# Allegro board ClassDAmp.brd
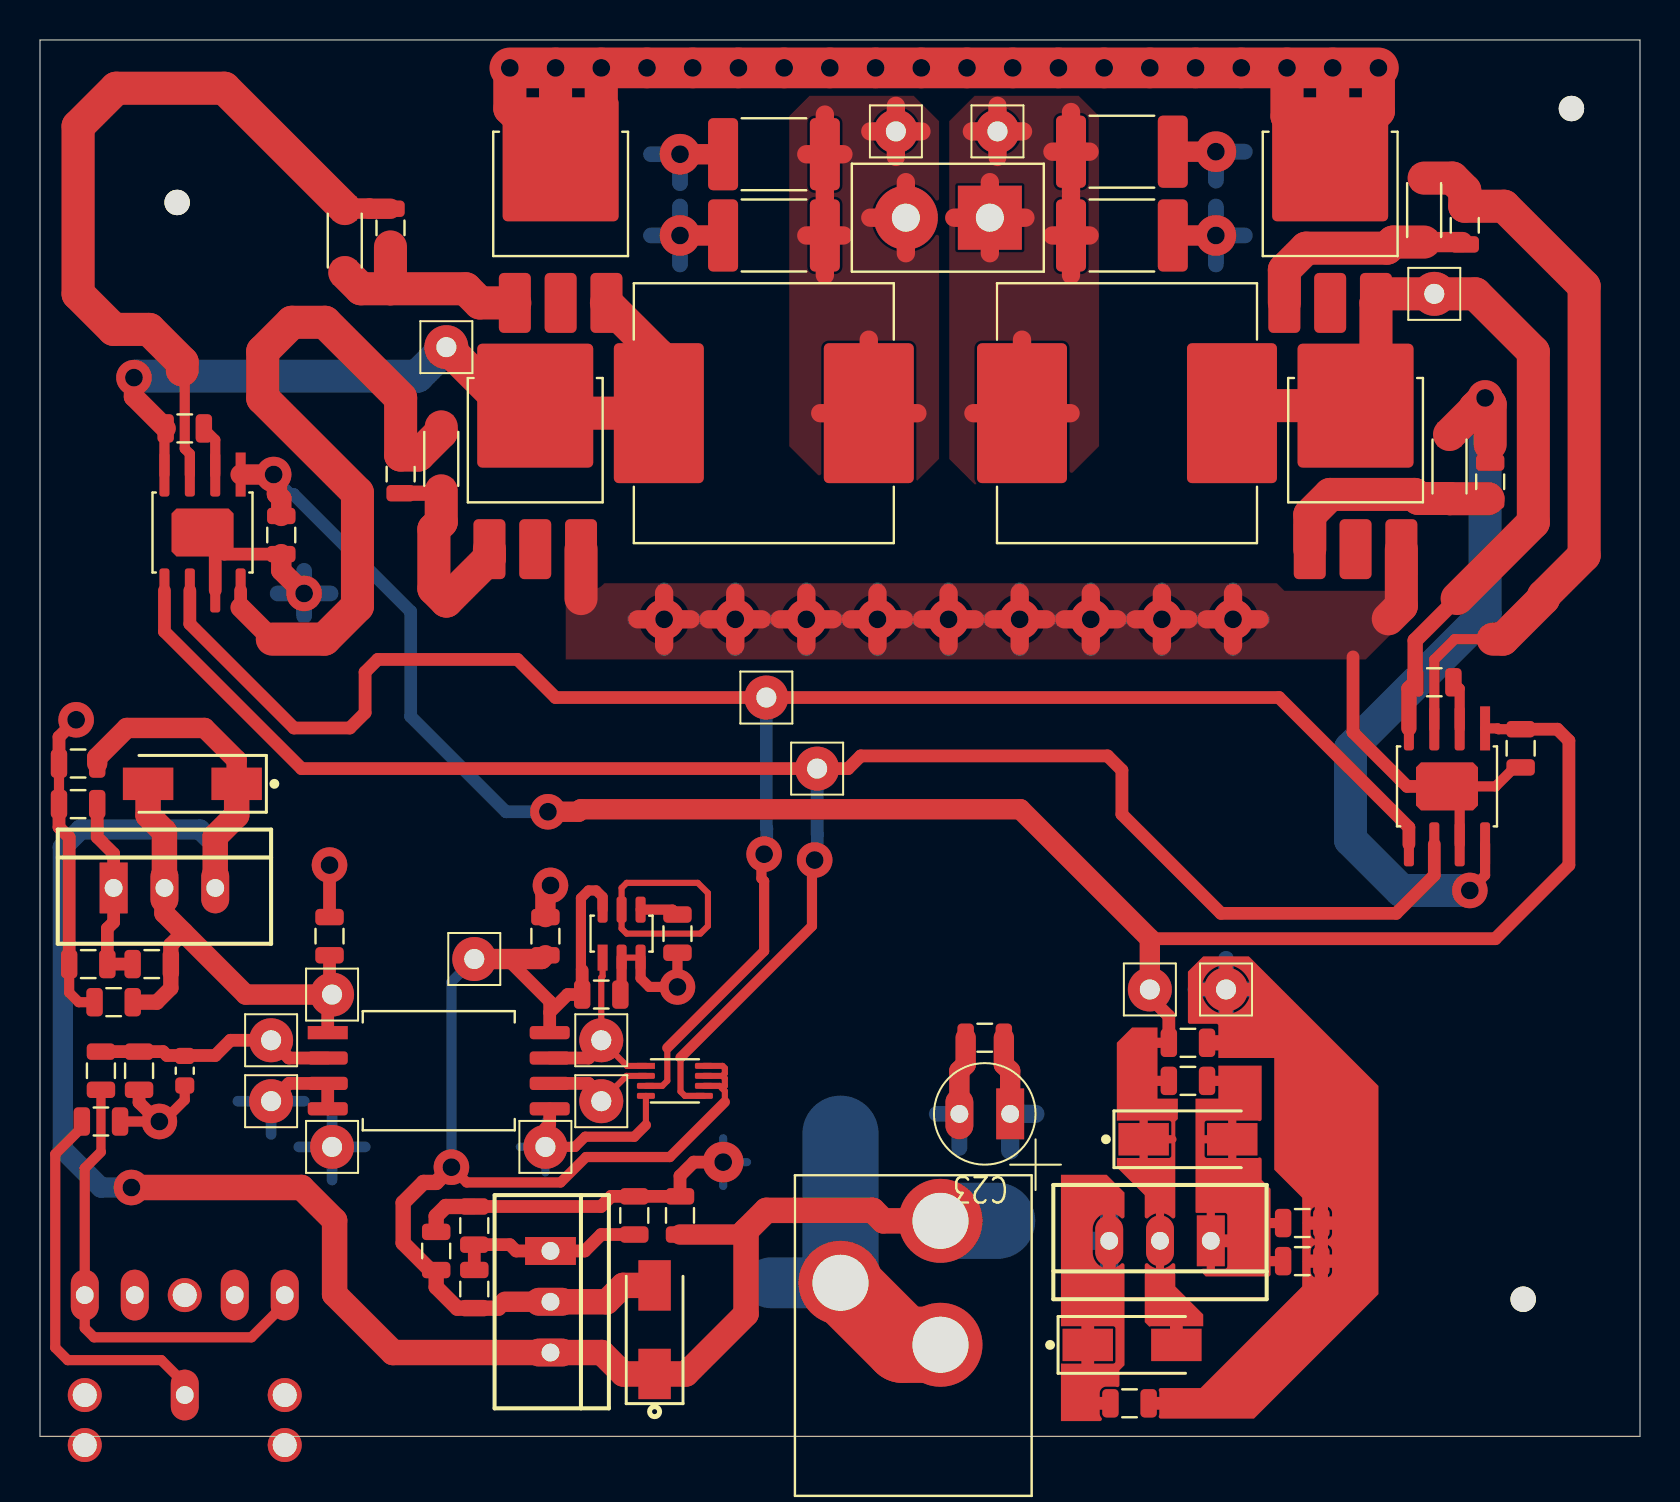
[diagram p0: board, top side]
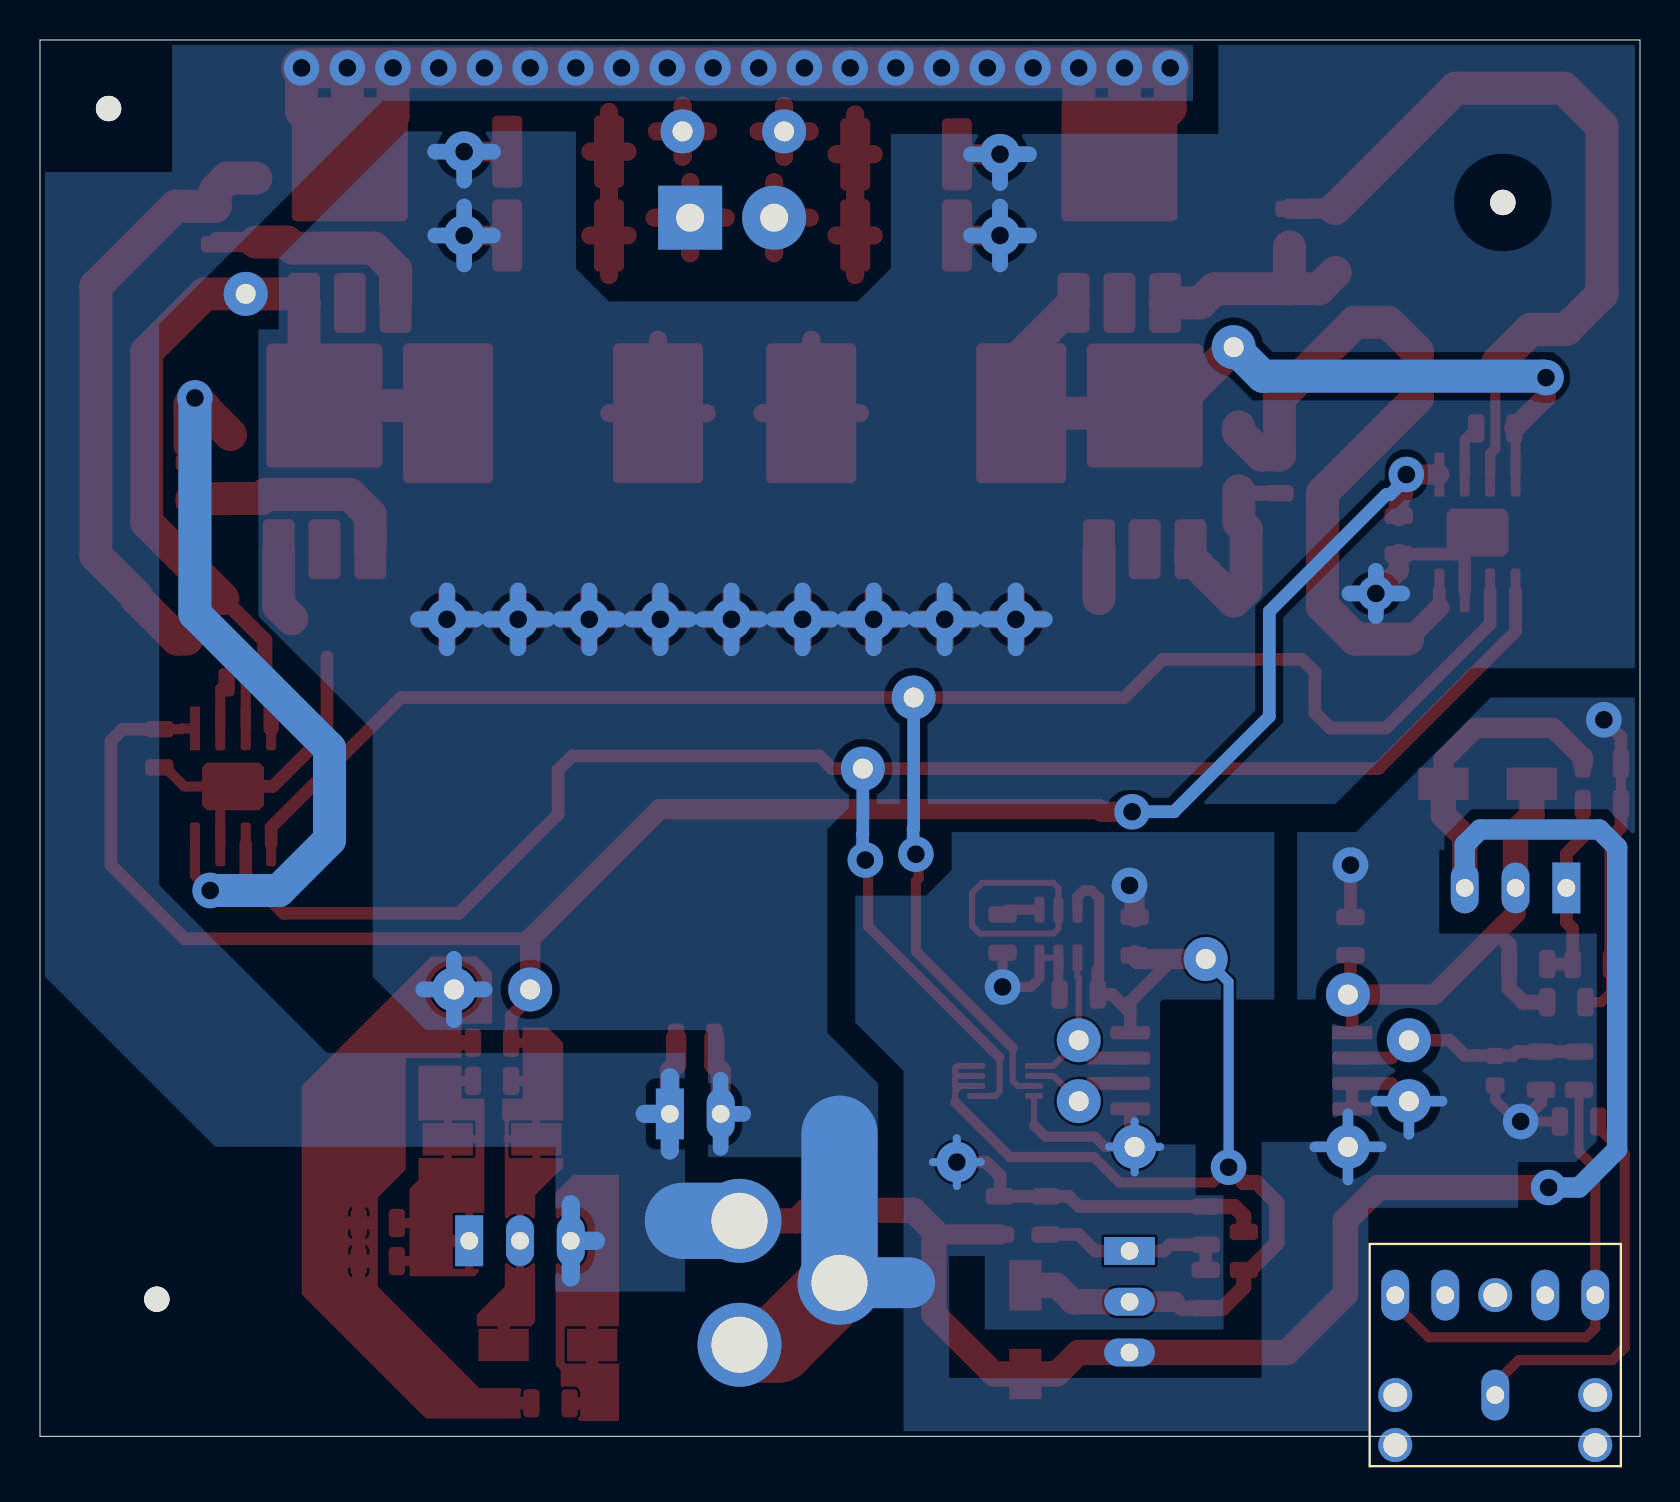
[diagram p1: board, bottom side, seen from below]

Outline 80.01 x 69.85 mm; copper layers: TOP, LAYER2, LAYER3, BOTTOM. Coordinates in mm from the lower left corner of the outline.
Outline path: 0,69.85 0,0 80.01,0 80.01,69.85 0,69.85

## Design rules (mm)
constraint set DEFAULT: min track width 0.152

## Placement (name value [footprint] x y rotation side)
C1  1n  [R0603RESC157X85X50L30N]  7.24 18.29 90 top
C2  100n  [R0805RESC200X125X50L30N]  14.48 25.02 90 top
C3  100n  [R0805RESC200X125X50L30N]  25.27 25.02 90 top
C4  100n  [R0805RESC200X125X50L30N]  28.07 22.1 180 top
C5  470n  [R0805RESC200X125X50L30N]  12.06 45.09 90 top
C6  470n  [R0805RESC200X125X50L30N]  74.04 34.42 90 top
C7  22n  [R0805RESC200X125X50L30N]  69.72 37.72 0 top
C8  22n  [R0805RESC200X125X50L30N]  7.24 50.42 180 top
C9  220n  [CAPC450X320X320L25]  36.7 64.14 0 top
C10  220n  [CAPC450X320X320L25]  54.1 64.26 180 top
C11  DNF  [CAPC450X320X320L25]  36.7 60.07 0 top
C12  DNF  [CAPC450X320X320L25]  54.1 60.07 180 top
C13  100n  [R0805RESC200X125X50L30N]  54.48 1.65 0 top
C14  1u  [R0805RESC200X125X50L30N]  57.4 19.68 0 top
C15  10u  [R0805RESC200X125X50L30N]  63.12 10.67 0 top
C16  100nF  [R0805RESC200X125X50L30N]  1.91 33.66 180 top
C17  1u  [R0805RESC200X125X50L30N]  3.68 21.72 180 top
C18  10u  [R0805RESC200X125X50L30N]  2.41 23.62 180 top
C19  1u  [R0805RESC200X125X50L30N]  19.81 9.27 90 top
C20  100n  [R0805RESC200X125X50L30N]  32 11.05 90 top
C21  10u  [R0805RESC200X125X50L30N]  21.72 10.54 90 top
C22  100n  [R0805RESC200X125X50L30N]  47.24 19.94 180 top
C23  100u  [GU-CAPCYL100]  48.51 16.13 180 top
D1  1N4148W  [GU-SOD-123FL]  15.24 59.82 270 top
D2  1N4148W  [GU-SOD-123FL]  20.07 48.9 270 top
D3  1N4148W  [GU-SOD-123FL]  70.48 48.51 270 top
D4  1N4148W  [GU-SOD-123FL]  69.22 61.34 270 top
D5  S1B  [DO-214AC]  57.4 14.86 0 top
D6  S1B  [DO-214AC]  54.61 4.57 0 top
D7  S1B  [DO-214AC]  30.73 5.33 90 top
D9  S1B  [DO-214AC]  7.62 32.64 180 top
J3  30V  [CLIFF_DC-10A_P]  49.53 -2.92 90 top
J5  Output  [RHDRV2W140P420_550_2X1_960X5-1]  47.5 60.96 180 top
L1  10u  [INDM1270X1270X850L230X500]  36.2 51.18 0 top
L2  10u  [INDM1270X1270X850L230X500]  54.36 51.18 180 top
NOREF  -  [unnamed]  76.58 66.42 0 top
NOREF#2  -  [unnamed]  74.17 6.86 0 top
NOREF#3  -  [unnamed]  6.86 61.72 0 top
R1  2k  [R0805RESC200X125X50L30N]  3.05 18.29 90 top
R2  1k  [R0805RESC200X125X50L30N]  4.95 18.29 270 top
R3  2k  [R0805RESC200X125X50L30N]  3.05 15.75 0 top
R4  200K  [R0805RESC200X125X50L30N]  31.88 25.15 90 top
R5  10  [R0805RESC200X125X50L30N]  17.53 60.45 270 top
R6  10  [R0805RESC200X125X50L30N]  18.03 48.13 270 top
R7  10  [R0805RESC200X125X50L30N]  71.25 60.58 90 top
R8  10  [R0805RESC200X125X50L30N]  72.52 47.75 90 top
R9  1.65k  [R0805RESC200X125X50L30N]  63.12 8.76 0 top
R10  240  [R0805RESC200X125X50L30N]  57.4 17.78 0 top
R11  240  [R0805RESC200X125X50L30N]  21.72 7.37 90 top
R12  390  [R0805RESC200X125X50L30N]  29.72 11.05 90 top
R13  240  [R0805RESC200X125X50L30N]  5.59 23.62 180 top
R14  715  [R0805RESC200X125X50L30N]  1.91 31.62 180 top
T1  VinP  [TESTPOINT]  11.56 19.81 0 top
T2  VinN  [TESTPOINT]  11.56 16.76 0 top
T3  test_point_0  [TESTPOINT]  14.61 22.1 0 top
T4  test_point_0  [TESTPOINT]  14.61 14.48 0 top
T5  test_point_0  [TESTPOINT]  21.72 23.88 0 top
T6  test_point_0  [TESTPOINT]  25.27 14.48 0 top
T7  CLK  [TESTPOINT]  28.07 19.81 0 top
T8  test_point_0  [TESTPOINT]  28.07 16.76 0 top
T9  SIGNAL+  [TESTPOINT]  38.86 33.4 90 top
T10  SIGNAL-  [TESTPOINT]  36.32 36.96 90 top
T11  PREFILTER+  [TESTPOINT]  20.32 54.48 0 top
T12  PREFILTER-  [TESTPOINT]  69.72 57.15 0 top
T13  SIGNAL+  [TESTPOINT]  42.8 65.28 0 top
T14  SIGNAL-  [TESTPOINT]  47.88 65.28 0 top
T15  test_point_0  [TESTPOINT]  55.5 22.35 0 top
T16  test_point_0  [TESTPOINT]  59.31 22.35 0 top
U1  PHONEJACK STEREO SW  [3-5MM-STEREO-20-0137]  7.24 4.06 90 bottom
U2  AMC1204  [SOIC8P127_585X1150X280L75X41]  19.94 18.29 270 top
U3  LTC6907  [SOT23-6P95_270X145L35X42]  29.08 25.15 0 top
U4  NC7SV74  [SOP8P50_200X310X80L25X22]  31.75 17.78 270 top
U5  UCC27211  [SOIC9P127_490X600X170L83X41T-1]  8.13 45.21 180 top
U6  UCC27211  [SOIC9P127_490X600X170L83X41T-1]  70.36 32.51 180 top
U7  MOSFET - NVD5C684NL  [DPAK4P229_990X238L159X76T480-1]  65.79 48.77 0 top
U8  MOSFET - NVD5C684NL  [DPAK4P229_990X238L159X76T480-1]  24.77 48.77 0 top
U9  MOSFET - NVD5C684NL  [DPAK4P229_990X238L159X76T480-1]  26.04 61.09 0 top
U10  MOSFET - NVD5C684NL  [DPAK4P229_990X238L159X76T480-1]  64.52 61.09 0 top
U11  LM317M  [GU-TO220AB]  58.55 9.78 180 top
U12  LM317M  [GU-TO220AB]  25.53 9.27 270 top
U13  LM317M  [GU-TO220AB]  3.68 27.43 0 top

## Library data of the parts
C1-C14 C16 C17 C19 C20 = CAP NP
C15 C18 C21 C22 = CAPACITOR NON-POL
C23 = CAPACITOR POL
D1 = DIODE_2
D2 = DIODE_3
D3 = DIODE_5
D4 = DIODE_4
D5-D7 D9 = DIODE PIN_0
J3 = CON3
J5 = HEADER 2
L1 L2 = INDUCTOR
R1-R14 = R
T1-T16 = test_point_0
U1 = PHONEJACK STEREO SW_0
U2 = AMC1204
U3 = LTC6907
U4 = NC7SV74
U5 U6 = UCC27211_2
U7-U10 = MOSFET - NVD5C684NL_1
U11-U13 = LM317M_0

## Footprints (pads in the part's own frame, mm; a bottom-side part is the same pattern mirrored in y, then rotated)
3-5MM-STEREO-20-0137
  round 1.7 hole 1.2: (-4.5,-5) (-4.5,5) (-2,-5) (-2,5) (3,0)
  oval 2.54x1.397 hole 0.889: 1(-2,0) 2(3,5) 3(3,2.5) 4(3,-2.5) 5(3,-5)
CAPC450X320X320L25
  rrect 1.5x3.61 smd: 1(-2.545,0) 2(2.545,0)
CLIFF_DC-10A_P
  round 4.2 hole 2.8: 1(13.7,4.5) 2(10.6,9.5) 3(7.5,4.5)
DO-214AC
  rect 2.52x1.62 smd: A(2.215,0) C(-2.215,0)
DPAK4P229_990X238L159X76T480-1
  rrect 1.6x3 smd: 1(-2.29,-4.39) 2(0,-4.39) 3(2.29,-4.39)
  rrect 5.8x6.2 smd: 4(0,2.79)
GU-CAPCYL100
  rect 1.397x2.54 hole 0.889: 1(0,0)
  oval 1.397x2.54 hole 0.889: 2(2.54,0)
GU-SOD-123FL
  rect 1.2x1.2 smd: A(1.6,0) C(-1.6,0)
GU-TO220AB
  rect 1.397x2.54 hole 0.889: 1(0,0)
  oval 1.397x2.54 hole 0.889: 2(2.54,0) 3(5.08,0)
INDM1270X1270X850L230X500
  rrect 4.5x7 smd: 1(-5.25,0) 2(5.25,0)
R0603RESC157X85X50L30N
  rrect 0.81x0.95 smd: 1(-0.74,0) 2(0.74,0)
R0805RESC200X125X50L30N
  rrect 0.82x1.42 smd: 1(-0.955,0) 2(0.955,0)
RHDRV2W140P420_550_2X1_960X5-1
  rect 3.2x3.2 hole 1.4: 1(0,0)
  round 3.2 hole 1.4: 2(4.2,0)
SOIC8P127_585X1150X280L75X41
  rect 0.66x2 smd: 1(-1.905,-5.55)
  rrect 0.66x2 smd: 2(-0.635,-5.55) 3(0.635,-5.55) 4(1.905,-5.55) 5(1.905,5.55) 6(0.635,5.55) 7(-0.635,5.55) 8(-1.905,5.55)
SOIC9P127_490X600X170L83X41T-1
  rect 0.5x2.2 smd: 1(-1.905,-2.9)
  rrect 0.5x2.2 smd: 2(-0.635,-2.9) 3(0.635,-2.9) 4(1.905,-2.9) 5(1.905,2.9) 6(0.635,2.9) 7(-0.635,2.9) 8(-1.905,2.9)
  rrect 3.1x2.4 smd: 9(0,0)
SOP8P50_200X310X80L25X22
  rect 0.3x0.9 smd: 1(-0.75,-1.45)
  rrect 0.3x0.9 smd: 2(-0.25,-1.45) 3(0.25,-1.45) 4(0.75,-1.45) 5(0.75,1.45) 6(0.25,1.45) 7(-0.25,1.45) 8(-0.75,1.45)
SOT23-6P95_270X145L35X42
  rect 0.5x1.3 smd: 1(-0.95,-1.2)
  rrect 0.5x1.3 smd: 2(0,-1.2) 3(0.95,-1.2) 4(0.95,1.2) 5(0,1.2) 6(-0.95,1.2)
TESTPOINT
  round 2.2 hole 1: 1(0,0)
unnamed
  round 1.27 hole 3.962 unplated: (0,0)

## Nets
3V3: C3.1 C4.2 C19.1 D7.A R11.1 T5.1 U2.8 U3.6(V+) U4.6 U4.7 U4.8(VCC) U12.2(OUTPUT)
5V: C2.1 C17.1 D9.A R13.1 T3.1 U2.1 U13.2(OUTPUT)
10V: C5.2 C6.2 C14.1 D5.C(K) D6.A R10.1 T15.1 U5.1 U6.1 U11.2(OUTPUT)
GND1: C1.1 C2.2 C3.2 C4.1 C5.1 C6.1 C9.1 C10.1 C11.1 C12.1 C13.2 C14.2 C15.2 C16.2 C17.2 C18.2 C19.2 C20.2 C21.2 C22.2 C23.2 J3.2 J3.3 R2.2 R3.2 R4.1 R9.2 R12.2 R14.2 T2.1 T4.1 T6.1 T16.1 U2.3 U2.4 U2.5 U3.2 U3.3 U4.4 U5.7(VSS) U5.9 U6.7(VSS) U6.9 U7.3(S) U8.3(S)
+V_RAIL: C13.1 C16.1 C20.1 C22.1 C23.1 D6.C(K) D7.C(K) D9.C(K) J3.1 U9.4 U10.4 U11.3 U12.3 U13.3
CLK: T7.1 U2.7 U3.1 U4.1
D: U7.2 U8.2 U9.2 U10.2
MOD_SIGNAL: T8.1 U2.6 U4.2
PREFILTER+: C8.2 L1.1 T11.1 U5.4 U8.4 U9.3(S)
PREFILTER-: C7.1 L2.1 T12.1 U6.4 U7.4 U10.3(S)
SIGNAL+: T9.1 U4.5 U5.5 U6.6
SIGNAL-: T10.1 U4.3 U5.6 U6.5
N08313: R1.1 U1.2 U1.5
N08317: R3.1 U1.1(E)
N08321: C1.2 R1.2 R2.1 T1.1 U2.2(VINP)
N11549: R4.2 U3.4
N14416: D3.C(K) R8.2 U6.8
N14431: D4.C(K) R7.2 U6.3
N14441: D1.C(K) R5.1 U5.3
N14452: D2.C(K) R6.1 U5.8
N14665: D4.A R7.1 U10.1
N14669: D3.A R8.1 U7.1
N14687: D1.A R5.2 U9.1
N14691: D2.A R6.2 U8.1
N16540: C8.1 U5.2
N16584: C7.2 U6.2
N20136: C9.2 C11.2 J5.2 L1.2 T13.1
N20333: C10.2 C12.2 J5.1 L2.2 T14.1
N24103: C15.1 D5.A R9.1 R10.2 U11.1
N25160: C21.1 R11.2 R12.1 U12.1
N25746: C18.1 R13.2 R14.1 U13.1

Pads without a net: U1 3 4; U3 5

## Via types
v1: diameter 1.778, hole 0.889, TOP to BOTTOM, 35 vias
v2: diameter 2.032, hole 0.889, TOP to BOTTOM, 14 vias

## Routing (per net, layer and track width the routed paths; a pad name or vN(x,y) marks a point on that pad's centre or on a via; arc(x,y) is an arc through that point)
3V3: length 68.5
  TOP w0.305: U4.8 34.13,18.53 34.25,18.41 34.25,18.15 34.12,18.03 ; 34.12,18.03 34.25,17.91 34.25,17.53 34.12,17.4 ; 34.12,18.03 U4.7 ; 34.12,17.4 33.99,17.53 U4.6 ; 34.12,17.4 34.25,17.27 34.25,16.72
  TOP w0.508: 34.25,16.72 31.5,13.97 27.3,13.97 26.04,12.7 21.34,12.7 v1(20.57,13.46) ; 27.11,23.31 27.05,23.37 27.05,26.92 27.43,27.3 27.81,27.3 28.13,26.98 U3.6
  TOP w0.635: 25.49,21.2 26.38,22.1 C4.2 27.11,23.31 ; 25.49,21.2 25.49,21.76 23.37,23.88 23.26,23.88 ; 25.49,21.2 U2.8
  TOP w0.762: v1(20.57,13.46) 19.81,12.7 19.18,12.7 18.16,11.68 18.16,9.67 19.51,8.32 C19.1 19.81,7.47 20.87,6.41 R11.1 22.94,6.41 23.26,6.73
  TOP w1.016: T5.1 23.26,23.88 ; C3.1 25.09,23.88 23.37,23.88 ; 23.26,6.73 U12.2
  TOP w1.27: U12.2 28.34,6.73 29.16,7.55 D7.A
  BOTTOM w0.508: v1(20.57,13.46) 20.57,22.73 T5.1
5V: length 26.4
  TOP w0.635: U2.1 14.39,21.76 14.73,22.1 ; 14.73,22.1 T3.1 ; 14.73,22.1 14.48,22.35 C2.1
  TOP w0.762: C17.1 5.84,21.72 6.54,22.42 R13.1 6.54,24.58 7.18,25.21
  TOP w1.016: T3.1 10.29,22.1 6.22,26.16 U13.2
  TOP w1.27: D9.A 5.41,31.07 6.22,30.25 U13.2
10V: length 109.2
  TOP w0.406: D5.C 56.63,14.86 ; D5.C 55.19,15.85 ; D5.C 55.19,13.87 ; 56.01,8.33 U11.2 56.01,11.23
  TOP w0.508: U6.1 72.89,35.41 72.93,35.37 C6.2 ; R10.1 55.24,17.78 ; C14.1 55.24,19.68
  TOP w0.635: C6.2 75.88,35.37 76.45,34.8 76.45,28.57 72.77,24.89 55.5,24.89 ; C14.1 56.45,21.02 55.5,21.97 T15.1 ; D6.A 56.82,5.66
  TOP w1.016: v1(25.4,31.24) 26.92,31.24 27.05,31.37 49.02,31.37 55.5,24.89 T15.1 ; U5.1 v1(11.68,48.11) 11.68,47.92 11.85,47.76 11.85,47.14 12.06,46.92 C5.2
  BOTTOM w0.635: v1(11.68,48.11) 11.68,47.92 12.49,47.11 12.68,47.11 18.54,41.26 18.54,36.01 23.3,31.24 v1(25.4,31.24)
GND1: length 295.9
  TOP w0.305: 30.3,15.57 U4.4 ; U3.2 U3.3
  TOP w0.508: R4.1 v1(31.88,22.48) 30.47,22.48 30.03,22.92 U3.3 ; 30.3,15.57 29.72,14.99 27.26,14.99 26.75,14.48 T6.1 ; C6.1 73.74,33.46 72.79,32.51 U6.9 70.99,31.88 70.99,29.61 ; C4.1 29.08,22.16 U3.2 ; C17.2 1.94,21.72 1.46,22.2 C18.2 ; R3.2 v1(5.97,15.75) 6.16,15.75 7.24,16.83 C1.1 ; R14.2 C16.2
  TOP w0.635: C21.2 28.06,11.5 28.56,12 R12.2 C20.2 32,13.03 32.69,13.72 v2(34.16,13.72) ; R14.2 0.95,30.47 1.46,29.96 C18.2 ; U2.4 U2.3 12.45,17.65 T2.1 ; C2.2 v1(14.48,28.57) ; R2.2 4.95,16.7 5.9,15.75 ; U2.5 25.49,15.61 25.27,15.39 T6.1 ; C13.2 56.01,1.65 ; 8.76,44.58 U5.7 ; 8.76,44.58 U5.9 ; 8.76,44.58 9.21,44.13 C5.1 ; U6.9 68.36,32.51 65.66,35.22 65.66,38.99 ; v1(1.81,35.84) 0.95,34.99 C16.2
  TOP w0.66: C15.2 64.66,10.67 ; C15.2 64.07,9.78 ; C15.2 63.49,10.67 ; C15.2 64.07,11.56 ; T16.1 60.59,22.35 ; T16.1 58.03,22.35 ; T16.1 59.31,21.07 ; T16.1 59.31,23.63 ; 63.49,8.76 R9.2 ; R9.2 64.07,7.87 ; R9.2 64.66,8.76 ; R9.2 64.07,9.65
  TOP w0.762: C19.2 19.81,11.02 20.29,11.5 C21.2 ; 59.4,19.68 C14.2 ; 25.27,27.1 25.53,27.36 v1(25.53,27.56)
  TOP w0.914: v2(34.77,40.87) 34.77,42.19 ; v2(34.77,40.87) 33.44,40.87 ; v2(34.77,40.87) 34.77,39.55 ; v2(34.77,40.87) 36.09,40.87 ; 40.56,40.87 v2(41.88,40.87) ; v2(41.88,40.87) 41.88,42.19 ; v2(41.88,40.87) 43.2,40.87 ; v2(41.88,40.87) 41.88,39.55 ; 48.99,39.55 v2(48.99,40.87) ; v2(48.99,40.87) 50.31,40.87 ; v2(48.99,40.87) 48.99,42.19 ; v2(48.99,40.87) 47.67,40.87 ; v2(52.55,40.87) 52.55,42.19 ; v2(52.55,40.87) 51.22,40.87 ; v2(52.55,40.87) 52.55,39.55 ; v2(52.55,40.87) 53.87,40.87 ; 58.34,40.87 v2(59.66,40.87) ; v2(59.66,40.87) 59.66,42.19 ; v2(59.66,40.87) 59.66,39.55 ; v2(59.66,40.87) 60.98,40.87 ; v2(31.21,40.87) 32.53,40.87 ; v2(31.21,40.87) 31.21,39.55 ; v2(31.21,40.87) 31.21,42.19 ; v2(31.21,40.87) 29.89,40.87 ; v2(56.1,40.87) 57.42,40.87 ; v2(56.1,40.87) 56.1,42.19 ; v2(56.1,40.87) 56.1,39.55 ; v2(56.1,40.87) 54.78,40.87 ; 44.11,40.87 v2(45.43,40.87) ; v2(45.43,40.87) 46.76,40.87 ; v2(45.43,40.87) 45.43,42.19 ; v2(45.43,40.87) 45.43,39.55 ; v2(38.32,40.87) 38.32,42.19 ; v2(38.32,40.87) 39.64,40.87 ; v2(38.32,40.87) 38.32,39.55 ; v2(38.32,40.87) 37,40.87
  TOP w1.016: C22.2 46.29,18.59 45.97,18.28 C23.2 ; C5.1 12.06,43.31 v1(13.21,42.16) ; v2(58.8,64.26) C10.1 ; C9.1 v2(32,64.14) ; C11.1 v2(32,60.07) ; C3.2 25.27,27.1 ; v2(58.8,60.07) C12.1
  TOP w1.651: 67.42,40.89 68.08,41.55 U7.3 ; 27.06,41.91 U8.3
  TOP w3.81: J3.3 43.13,4.58 J3.2
  BOTTOM w0.406: 32.97,13.72 v2(34.16,13.72) ; v2(34.16,13.72) 34.16,12.52 ; v2(34.16,13.72) 35.36,13.72 ; v2(34.16,13.72) 34.16,14.91 ; T6.1 26.55,14.48 ; T6.1 25.27,13.2 ; T6.1 23.99,14.48 ; T6.1 25.27,15.76
  BOTTOM w0.533: 9.9,16.76 T2.1 ; T2.1 13.22,16.76 ; T2.1 11.56,15.1 ; T4.1 16.26,14.48 ; T4.1 14.61,16.14 ; T4.1 12.95,14.48 ; T4.1 14.61,12.82
  BOTTOM w0.787: v2(58.8,60.07) 58.8,61.52 ; v2(58.8,60.07) 60.25,60.07 ; v2(58.8,60.07) 58.8,58.62 ; v2(58.8,60.07) 57.35,60.07 ; 59.31,20.82 T16.1 ; T16.1 60.84,22.35 ; T16.1 59.31,23.88 ; T16.1 57.78,22.35 ; 54.65,40.87 v2(56.1,40.87) ; v2(56.1,40.87) 56.1,42.32 ; v2(56.1,40.87) 57.55,40.87 ; v2(56.1,40.87) 56.1,39.42 ; v2(52.55,40.87) 53.99,40.87 ; v2(52.55,40.87) 51.1,40.87 ; v2(52.55,40.87) 52.55,39.42 ; v2(52.55,40.87) 52.55,42.32 ; C23.2 45.97,17.83 ; C23.2 45.97,14.43 ; C23.2 44.84,16.13 ; 58.21,40.87 v2(59.66,40.87) ; v2(59.66,40.87) 59.66,42.32 ; v2(59.66,40.87) 59.66,39.42 ; v2(59.66,40.87) 61.11,40.87 ; v2(34.77,40.87) 36.21,40.87 ; v2(34.77,40.87) 34.77,42.32 ; v2(34.77,40.87) 34.77,39.42 ; v2(34.77,40.87) 33.32,40.87 ; v2(41.88,40.87) 41.88,42.32 ; v2(41.88,40.87) 40.43,40.87 ; v2(41.88,40.87) 41.88,39.42 ; v2(41.88,40.87) 43.33,40.87 ; 45.43,39.42 v2(45.43,40.87) ; v2(45.43,40.87) 46.88,40.87 ; v2(45.43,40.87) 45.43,42.32 ; v2(45.43,40.87) 43.99,40.87 ; v2(48.99,40.87) 48.99,42.32 ; v2(48.99,40.87) 48.99,39.42 ; v2(48.99,40.87) 50.44,40.87 ; v2(48.99,40.87) 47.54,40.87 ; v1(13.21,42.16) 13.21,43.29 ; v1(13.21,42.16) 13.21,41.03 ; v1(13.21,42.16) 14.53,42.16 ; v1(13.21,42.16) 11.89,42.16 ; v2(31.21,40.87) 32.66,40.87 ; v2(31.21,40.87) 31.21,39.42 ; v2(31.21,40.87) 31.21,42.32 ; v2(31.21,40.87) 29.76,40.87 ; 58.8,62.81 v2(58.8,64.26) ; v2(58.8,64.26) 60.25,64.26 ; v2(58.8,64.26) 57.35,64.26 ; 30.56,60.07 v2(32,60.07) ; v2(32,60.07) 32,61.52 ; v2(32,60.07) 32,58.62 ; v2(32,60.07) 33.45,60.07 ; 38.32,39.42 v2(38.32,40.87) ; v2(38.32,40.87) 36.87,40.87 ; v2(38.32,40.87) 38.32,42.32 ; v2(38.32,40.87) 39.77,40.87 ; 32,62.69 v2(32,64.14) ; v2(32,64.14) 33.45,64.14 ; v2(32,64.14) 30.56,64.14
  BOTTOM w2.54: J3.2 36.52,7.68
  BOTTOM w3.81: J3.2 40.03,15.14
+V_RAIL: length 198.2
  TOP w0.635: 53.47,11.43 U11.3 53.47,8.13 ; 52.4,3.37 D6.C 52.4,5.66 ; C13.1 52.96,1.65
  TOP w1.016: C22.1 48.2,18.59 48.51,18.28 C23.1 ; C20.1 35.11,10.09 ; C16.1 2.86,33.96 4.34,35.43 8.23,35.43 9.83,33.83 D9.C
  TOP w1.27: J3.1 42.17,10.78 41.64,11.3 36.32,11.3 35.31,10.29 ; D9.C 9.83,31.07 8.76,30 U13.3 ; v1(4.57,12.45) 13.08,12.45 14.73,10.79 14.73,7.11 17.65,4.19 U12.3 28.09,4.19 29.16,3.12 D7.C 32.31,3.12 35.31,6.12 35.31,10.29 ; 35.31,10.29 35.11,10.09
  TOP w1.651: 25.78,64.13 23.5,66.42 v1(23.5,68.45) ; 25.78,64.13 v1(25.78,68.45) ; 25.78,64.13 U9.4 28.07,65.91 v1(28.07,68.45) ; 64.64,64 U10.4 62.36,66.04 v1(62.36,68.45) ; 64.64,64 v1(64.64,68.45) ; 64.64,64 66.93,66.29 v1(66.93,68.45)
  TOP w2.032: v1(66.93,68.45) v1(64.64,68.45) v1(62.36,68.45) v1(60.07,68.45) v1(57.78,68.45) v1(55.5,68.45) v1(53.21,68.45) v1(50.93,68.45) v1(48.64,68.45) v1(46.35,68.45) v1(44.07,68.45) v1(41.78,68.45) v1(39.5,68.45) v1(37.21,68.45) v1(34.92,68.45) v1(32.64,68.45) v1(30.35,68.45) v1(28.07,68.45) v1(25.78,68.45) v1(23.5,68.45)
  BOTTOM w0.914: U11.3 53.47,11.61 ; U11.3 52.21,9.78 ; U11.3 53.47,7.95 ; C23.1 49.77,16.13 ; C23.1 48.51,17.96 ; C23.1 48.51,14.3
  BOTTOM w1.016: U13.3 8.76,29.59 8,30.35 2.03,30.35 1.14,29.46 1.14,14.35 3.05,12.45 v1(4.57,12.45)
  BOTTOM w3.81: J3.1 47.86,10.78
CLK: length 10
  TOP w0.305: U3.1 28.13,23.02 28.07,22.95 T7.1 29.35,18.53 U4.1
  TOP w0.635: U2.7 27.43,18.92 28.07,19.56 T7.1
MOD_SIGNAL: length 5.9
  TOP w0.305: U4.2 29.33,18.03 T8.1
  TOP w0.635: T8.1 28.07,17.02 27.43,17.65 U2.6
Net_40: length 12.9
  TOP w0.305: 29.34,27.69 29.08,27.43 29.08,26.35 29.08,25.4 29.34,25.15 33.02,25.15 33.4,25.53 33.4,27.18 32.89,27.69 29.34,27.69
PREFILTER+: length 40.4
  TOP w0.508: C8.2 6.22,50.36 U5.4
  TOP w1.016: v1(4.7,52.96) 4.7,52 C8.2
  TOP w1.651: U9.3 30.95,54.08 L1.1 25.14,51.18 U8.4 23.25,51.56 T11.1
  BOTTOM w1.651: v1(4.7,52.96) 4.76,52.96 4.84,53.03 18.87,53.03 T11.1
PREFILTER-: length 42
  TOP w0.762: U6.4 68.45,37.4 C7.1 68.77,39.81 70.87,41.91
  TOP w1.651: 59.98,51.56 U7.4 66.81,52.58 U10.3 67.26,57.15 T12.1 71.78,57.15 74.68,54.25 74.68,45.72 70.87,41.91
SIGNAL+: length 95.8
  TOP w0.305: U4.5 32.25,17.03 32.03,17.25 32.03,18.95
  TOP w0.508: v1(38.74,28.83) 38.6,28.69 38.6,25.52 32.03,18.95
  TOP w0.635: U6.6 69.72,28.07 67.82,26.16 59.05,26.16 54.1,31.11 54.1,33.32 53.39,34.04 41.04,34.04 40.41,33.4 T9.1 13.08,33.4 6.22,40.26 U5.5
  BOTTOM w0.635: T9.1 38.86,30.11 38.87,30.1 38.87,28.96 v1(38.74,28.83)
SIGNAL-: length 94.3
  TOP w0.305: U4.3 31.12,17.53 31.37,17.78 31.37,19.43
  TOP w0.508: 31.37,19.43 36.21,24.27 36.21,27.77 36.08,27.91 36.08,28.99 v1(36.21,29.12)
  TOP w0.635: U5.6 7.49,40.64 12.7,35.43 15.49,35.43 16.26,36.2 16.26,38.23 16.89,38.86 23.88,38.86 25.78,36.96 T10.1 61.96,36.96 68.45,30.46 U6.5
  BOTTOM w0.635: v1(36.21,29.12) 36.35,29.25 36.35,30.4 36.32,30.42 T10.1
N08313: length 23.6
  TOP w0.457: 3.05,14.22 R1.1
  TOP w0.508: U1.2 11.98,6.81 11.98,6.37 10.57,4.95 2.7,4.95 2.24,5.41 U1.5 2.24,13.42 3.05,14.22
N08317: length 19.7
  TOP w0.508: R3.1 2.09,15.45 0.76,14.12 0.76,4.44 1.39,3.81 6.06,3.81 7.24,2.64 U1.1
N08321: length 12.1
  TOP w0.635: 7.22,19.05 6.35,19.05 6.16,19.24 R2.1 R1.2 ; 7.22,19.05 C1.2 ; 7.22,19.05 8.76,19.05 9.53,19.81 T1.1 12.45,18.92 U2.2
N11549: length 1.9
  TOP w0.508: R4.2 31.63,26.35 U3.4
N14416: length 40.4
  TOP w0.508: v1(71.5,27.3) 72.26,28.07 U6.8
  TOP w0.762: 72.52,49.62 R8.2
  TOP w1.651: v1(72.26,51.94) 72.23,51.91 ; 72.23,51.91 71.76,51.44 71.76,51.39 D3.C ; 72.23,51.91 72.52,51.62 72.52,49.62
  BOTTOM w1.651: v1(71.5,27.3) 68.06,27.3 65.53,29.84 65.53,34.42 72.26,41.15 v1(72.26,51.94)
N14431: length 37.3
  TOP w0.508: 72.67,39.88 70.74,39.88 69.72,38.86 U6.3
  TOP w1.651: D4.C 70.63,62.94 71.25,62.32 R7.2 73.21,61.53 77.22,57.53 77.22,44.07 75.18,42.04 75.18,41.91 73.15,39.88 72.67,39.88
N14441: length 39.7
  TOP w0.508: U5.3 7.49,49.15 7.24,49.4 7.24,53.21 7.11,53.34
  TOP w1.016: R5.1 16.48,61.41 16.47,61.42 D1.C
  TOP w1.651: D1.C 9.22,67.44 3.81,67.44 1.91,65.53 1.91,57.15 3.68,55.37 5.46,55.37 7.11,53.72 7.11,53.34
N14452: length 37.4
  TOP w0.635: 10.03,41.46 U5.8
  TOP w1.016: 11.62,39.88 10.03,41.46
  TOP w1.651: 11.62,39.88 14.22,39.88 15.88,41.53 15.88,47.19 11.14,51.93 11.14,54.27 12.6,55.73 14.25,55.73 18.03,51.94 R6.1 18.93,49.09 20.07,50.23 D2.C
N14665: length 11.3
  TOP w0.762: 71.13,59.74 R7.1
  TOP w1.016: D4.A 71.13,59.74
  TOP w1.651: D4.A 67.66,59.74 67.36,59.44 63.31,59.44 62.23,58.35 U10.1
N14669: length 11.7
  TOP w0.508: 72.41,46.9 R8.1 ; 63.5,44 U7.1
  TOP w1.651: U7.1 63.5,46.1 64.52,47.12 68.73,47.12 68.93,46.91 D3.A 70.5,46.9 72.41,46.9
N14687: length 11.2
  TOP w1.651: 17.53,57.4 21.29,57.4 21.99,56.7 U9.1 ; 17.53,57.4 16.05,57.4 D1.A ; 17.53,57.4 R5.2
N14691: length 11.5
  TOP w0.508: 19.95,47.18 D2.A
  TOP w0.762: R6.2 19.95,47.18
  TOP w1.651: U8.1 22.47,43.94 20.32,41.78 19.7,42.41 19.7,45.37 20.07,45.74 D2.A
N16540: length 2.5
  TOP w0.508: C8.1 8.76,49.85 U5.2
N16584: length 2.4
  TOP w0.508: C7.2 70.99,37.4 70.99,35.41
N20136: length 30.6
  TOP w0.914: C9.2 39.25,66.12 ; C9.2 38.32,64.14 ; C9.2 39.25,62.15 ; C9.2 40.18,64.14 ; 41.52,60.96 J5.2 ; J5.2 43.3,59.18 ; J5.2 43.3,62.74 ; T13.1 42.8,66.56 ; T13.1 42.8,64 ; T13.1 41.52,65.28 ; T13.1 44.08,65.28 ; C11.2 39.25,62.05 ; C11.2 38.32,60.07 ; C11.2 39.25,58.09 ; C11.2 40.18,60.07 ; 39.02,51.18 L1.2 ; L1.2 43.87,51.18 ; L1.2 41.44,54.86
N20333: length 32.4
  TOP w0.914: J5.1 49.28,60.96 ; J5.1 45.72,60.96 ; J5.1 47.5,62.74 ; J5.1 47.5,59.18 ; 51.56,62.28 C10.2 ; C10.2 50.63,64.26 ; C10.2 51.56,66.25 ; C10.2 52.49,64.26 ; C12.2 51.56,62.05 ; C12.2 52.49,60.07 ; C12.2 51.56,58.09 ; C12.2 50.63,60.07 ; T14.1 49.16,65.28 ; T14.1 47.88,66.56 ; T14.1 46.6,65.28 ; T14.1 47.88,64 ; L2.2 49.11,54.86 ; L2.2 51.53,51.18 ; L2.2 46.68,51.18
N24103: length 11.1
  TOP w0.406: D5.A 59.62,15.85 ; D5.A 58.18,14.86 ; D5.A 59.62,13.87 ; 58.55,8.33 U11.1 58.55,11.23
  TOP w0.508: 60.77,10.67 C15.1 ; R9.1 60.9,8.76 ; R10.2 59.18,17.78
  TOP w0.635: 59.88,9.78 U11.1
N25160: length 9.7
  TOP w0.635: R12.1 28.06,10.09 27.24,9.27 U12.1 23.81,9.27 23.5,9.59 C21.1 R11.2
N25746: length 9.7
  TOP w0.635: R14.1 2.86,29.97 3.68,29.15 U13.1 3.68,25.72 3.37,25.4 C18.1 R13.2

## Copper pours and planes (outline as drawn; the poured copper is in the pictures)
10V on TOP (solid shape): 56.71,8.65 56.77,8.56 56.77,7.49 58.17,6.1 58.17,5.51 58.08,5.51 55.57,5.51 55.54,5.51 55.51,5.5 55.48,5.48 55.24,5.71 55.24,8.56 55.31,8.65 55.42,8.63 56.01,8.38 56.6,8.63
10V on TOP (solid shape): 55.88,16.89 56.9,16.89 56.9,15.88 56.77,15.75 56.77,11 56.71,10.91 56.6,10.93 56.01,11.18 55.42,10.93 55.31,10.91 55.24,11 55.24,12.06 53.85,13.46 53.85,13.92 53.93,13.92 56.45,13.92 56.54,13.96 56.58,14.05 56.58,15.67 56.54,15.76 56.45,15.8 53.93,15.8 53.85,15.79 53.85,19.68 54.61,20.45 55.88,20.45
GND1 on TOP (solid shape): 66.93,17.53 66.93,7.11 60.71,0.89 56.05,0.89 56.01,0.9 55.98,0.91 55.96,0.93 55.95,0.96 55.94,0.99 55.96,1.06 55.97,1.12 55.98,1.15 55.98,2.15 55.97,2.18 55.96,2.24 55.94,2.32 55.95,2.34 55.96,2.37 55.98,2.39 56.01,2.4 56.05,2.41 58.04,2.41 63.12,7.49 63.12,9.26 63.54,9.26 63.54,8.26 63.54,8.24 63.55,8.18 63.56,8.13 63.59,8.09 63.62,8.04 63.65,8.01 63.7,7.97 63.74,7.95 63.8,7.93 63.85,7.93 63.87,7.93 64.27,7.93 64.3,7.93 64.35,7.93 64.4,7.95 64.45,7.98 64.49,8.01 64.53,8.04 64.56,8.09 64.59,8.13 64.6,8.18 64.61,8.24 64.61,8.26 64.61,9.26 64.61,9.29 64.6,9.34 64.59,9.39 64.56,9.44 64.53,9.48 64.49,9.52 64.45,9.55 64.4,9.58 64.35,9.59 64.3,9.6 64.27,9.6 63.87,9.6 63.85,9.6 63.8,9.59 63.74,9.57 63.7,9.55 63.65,9.52 63.62,9.48 63.59,9.44 63.56,9.39 63.55,9.34 63.54,9.29 63.54,9.26 63.12,9.26 63.12,11.17 63.54,11.17 63.54,10.17 63.54,10.14 63.55,10.09 63.56,10.04 63.59,9.99 63.62,9.95 63.65,9.91 63.7,9.88 63.74,9.86 63.8,9.84 63.85,9.83 63.87,9.83 64.27,9.83 64.3,9.83 64.35,9.84 64.4,9.86 64.45,9.88 64.49,9.91 64.53,9.95 64.56,9.99 64.59,10.04 64.6,10.09 64.61,10.14 64.61,10.17 64.61,11.17 64.61,11.19 64.6,11.25 64.59,11.3 64.56,11.34 64.53,11.39 64.49,11.42 64.45,11.46 64.4,11.48 64.35,11.5 64.3,11.5 64.27,11.51 63.87,11.51 63.85,11.5 63.8,11.5 63.74,11.48 63.7,11.46 63.65,11.42 63.62,11.39 63.59,11.34 63.56,11.3 63.55,11.25 63.54,11.19 63.54,11.17 63.12,11.17 63.12,11.94 61.72,13.34 61.72,18.92 58.93,18.92 58.93,20.57 58.86,20.64 57.47,20.64 57.4,20.7 57.4,22.4 58.08,22.4 58.08,22.3 58.09,22.2 58.11,22.11 58.13,22.01 58.16,21.92 58.2,21.83 58.25,21.74 58.3,21.65 58.36,21.58 58.42,21.5 58.49,21.43 58.57,21.37 58.65,21.31 58.74,21.26 58.83,21.22 58.92,21.19 59.02,21.16 59.11,21.14 59.21,21.13 59.31,21.12 59.41,21.13 59.51,21.14 59.6,21.16 59.7,21.19 59.79,21.22 59.88,21.26 59.97,21.31 60.05,21.37 60.12,21.43 60.19,21.5 60.26,21.58 60.32,21.65 60.37,21.74 60.42,21.83 60.46,21.92 60.49,22.01 60.51,22.11 60.53,22.2 60.54,22.3 60.54,22.4 60.53,22.5 60.51,22.6 60.49,22.69 60.46,22.79 60.42,22.88 60.37,22.97 60.32,23.05 60.26,23.13 60.19,23.2 60.12,23.27 60.05,23.33 59.97,23.39 59.88,23.44 59.79,23.48 59.7,23.52 59.6,23.54 59.51,23.56 59.41,23.58 59.31,23.58 59.21,23.58 59.11,23.56 59.02,23.54 58.92,23.52 58.83,23.48 58.74,23.44 58.65,23.39 58.57,23.33 58.49,23.27 58.42,23.2 58.36,23.13 58.3,23.05 58.25,22.97 58.2,22.88 58.16,22.79 58.13,22.69 58.11,22.6 58.09,22.5 58.08,22.4 57.4,22.4 57.4,23.24 58.17,24 60.45,24
GND1 on TOP: 26.29,38.86 66.29,38.86 67.56,40.13 67.56,42.29 62.23,42.29 61.85,42.67 26.29,42.67
GND1 on BOTTOM: 39.24,20.7 39.24,27.05 35.69,27.05 34.42,28.32 34.42,30.23 18.29,30.23 18.29,21.84 23.88,21.84 24,21.72 24,14.61 22.23,14.61 22.23,12.06 20.83,12.06 20.83,5.33 32.77,5.33 32.77,9.02 36.83,9.02 36.83,18.29
GND1 on BOTTOM: 6.1,11.43 6.1,13.72 3.17,13.72 0.25,16.64 0.25,36.96 7.46,36.96 14.2,30.23 17.14,30.23 17.14,21.84 15.42,21.84 15.37,14.73 18.92,14.73 18.92,2.92 34.54,2.92 34.54,9.02 36.83,9.02 36.83,0.25 13.59,0.25 13.59,11.43 ; 1 cut-out
GND1 on BOTTOM: 15.24,31.62 8.45,38.42 0.32,38.42 0.25,38.48 0.25,69.6 21.08,69.6 21.08,65.15 37.47,65.15 37.47,58.42 39.12,56.77 51.56,56.77 53.21,58.42 53.21,65.28 61.72,65.28 68.07,58.93 68.07,55.37 69.09,55.37 69.09,41.02 63.37,35.31 63.37,22.99 60.71,20.32 46.74,20.32 46.61,20.19 46.61,13.97 38.1,13.97 38.1,17.65 40.64,20.19 40.64,30.35 39.37,31.62
(no net) on TOP: 54.23,3.56 53.98,3.3 53.98,1.02 53.72,0.76 51.05,0.76 51.05,13.08 53.34,13.08 54.23,12.19
(no net) on TOP: 58.17,3.68 55.5,3.68 55.5,5.46 55.24,5.71 55.24,12.06 53.85,13.46 53.85,19.68 54.61,20.45 55.88,20.45 55.88,16.89 56.9,16.89 56.9,15.88 56.77,15.75 56.77,7.49 58.17,6.1
(no net) on TOP: 57.78,8.51 57.78,16.89 58.93,16.89 58.93,18.54 61.09,18.54 61.09,12.83 61.53,12.38 61.53,8.06 61.47,8 58.29,8
(no net) on TOP: 55.12,0.89 54.99,1.02 54.99,2.29 55.12,2.41 58.04,2.41 63.12,7.49 63.12,11.94 61.72,13.34 61.72,18.92 58.93,18.92 58.93,20.57 58.86,20.64 57.47,20.64 57.4,20.7 57.4,23.24 58.17,24 60.45,24 66.93,17.53 66.93,7.11 60.71,0.89
+V_RAIL on TOP (solid shape): 54.23,12.19 54.23,11 54.17,10.91 53.15,11.11 52.64,10.35 52.64,9.21 53.15,8.44 54.17,8.65 54.23,8.56 54.23,3.56 53.98,3.3 53.98,2.57 53.93,2.48 53.84,2.47 53.78,2.48 53.73,2.49 53.33,2.49 53.09,2.39 52.99,2.15 52.99,1.15 53.01,1.03 53.07,0.93 53.09,0.82 53,0.76 51.05,0.76 51.05,3.64 51.14,3.63 53.65,3.63 53.75,3.67 53.78,3.76 53.78,5.38 53.75,5.47 53.65,5.51 51.14,5.51 51.05,5.51 51.05,13.08 53.34,13.08
+V_RAIL on BOTTOM: 74.04,27.56 74.04,55.63 62.87,66.8 22.35,66.8 22.35,69.6 79.76,69.6 79.76,22.99 71.25,14.48 54.23,14.48 54.23,7.24 47.75,7.24 47.75,19.18 65.66,19.18
N20136 on TOP: 43.69,47.62 39.37,47.62 37.47,49.53 37.47,66.04 38.48,67.06 43.69,67.06 44.96,65.79 44.96,48.9
N20333 on TOP: 46.74,47.62 51.05,47.62 52.96,49.53 52.96,66.04 51.94,67.06 46.74,67.06 45.47,65.79 45.47,48.9
N24103 on TOP (solid shape): 61.09,15.87 61.04,15.78 60.94,15.78 60.91,15.79 60.88,15.8 58.36,15.8 58.27,15.76 58.23,15.67 58.23,14.05 58.27,13.96 58.36,13.92 60.88,13.92 60.91,13.93 60.94,13.94 61.04,13.93 61.09,13.85 61.09,12.83 61.53,12.38 61.53,8.06 61.47,8 58.29,8 58.09,8.21 58.06,8.32 58.16,8.38 59.25,8.38 59.34,8.42 59.37,8.51 59.37,11.05 59.34,11.14 59.25,11.18 57.85,11.18 57.84,11.18 57.8,11.19 57.78,11.23 57.78,16.89 58.93,16.89 58.93,18.54 61.09,18.54
